# EAGLE board controller_smd_canosc (EAGLE 4.13)
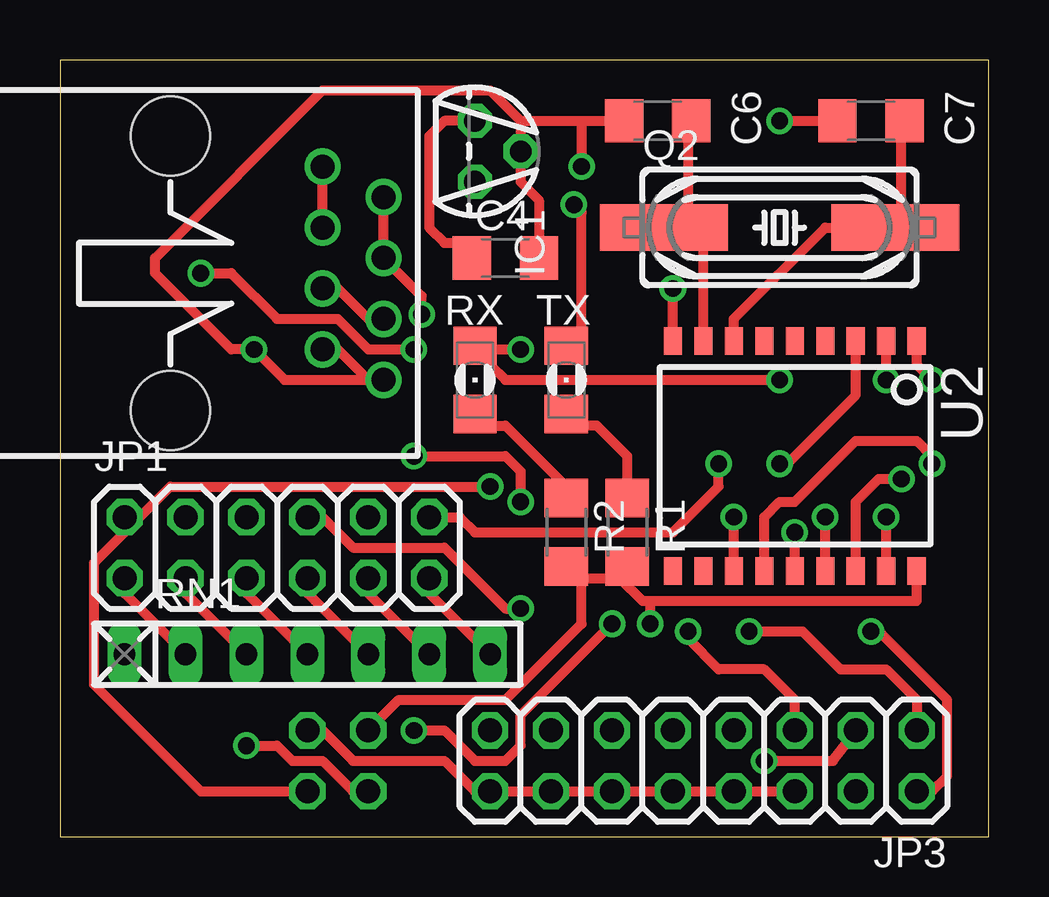
[diagram p0: board, top side]
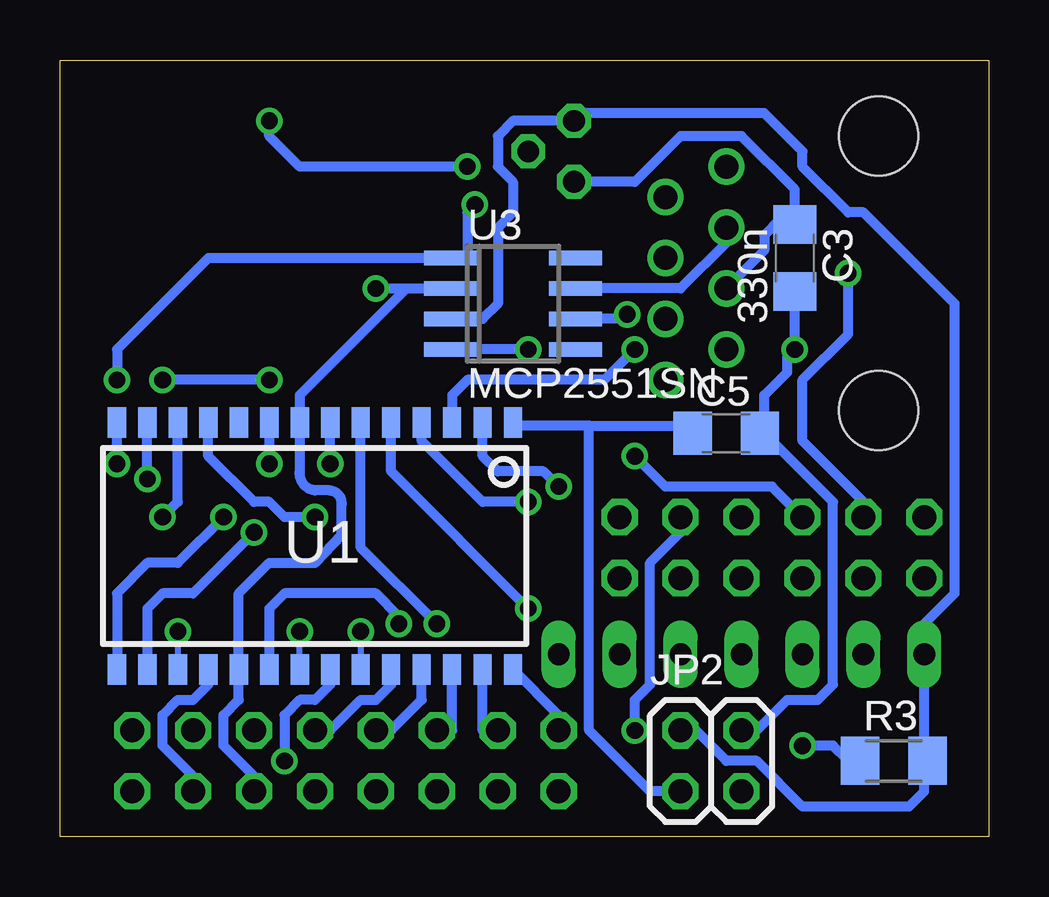
[diagram p1: board, bottom side, seen from below]

Size 38.72 x 32.37 mm. Coordinates in mm from the lower left corner, seen from the top.
Outline: 0,0 38.72,0 38.72,32.37 0,32.37 0,0
Copper layers (1*16): Top 0.035mm / dielectric 1.5mm / Bottom 0.035mm
Design rules "10mils": minimum track width 10mil, minimum drill 24mil, track to track 10mil, track to pad 10mil, pad to pad 10mil, via to via 10mil, smd to smd 10mil, copper to edge 40mil, drill to drill 10mil, minimum pad ring 10mil, minimum via ring 8mil, stop-mask expansion 0mil, vias tented up to drill 0mil, thermal gap 10mil

## Footprints (pad centres in the part's own frame; a part is rotated, then mirrored left to right if it is on the bottom)
C1206 = smd 1.6 x 1.8: 1 -1.4,0; 2 1.4,0
TO92 = drill 0.9 octagon: 1 -1.27,0; 2 0,1.905; 3 1.27,0
2X06 = drill 1 octagon: 1 -6.35,-1.27; 2 -6.35,1.27; 3 -3.81,-1.27; 4 -3.81,1.27; 5 -1.27,-1.27; 6 -1.27,1.27; 7 1.27,-1.27; 8 1.27,1.27; 9 3.81,-1.27; 10 3.81,1.27; 11 6.35,-1.27; 12 6.35,1.27
2X02 = drill 1 octagon: 1 -1.27,-1.27; 2 -1.27,1.27; 3 1.27,-1.27; 4 1.27,1.27
2X08 = drill 1 octagon: 1 -8.89,-1.27; 2 -8.89,1.27; 3 -6.35,-1.27; 4 -6.35,1.27; 5 -3.81,-1.27; 6 -3.81,1.27; 7 -1.27,-1.27; 8 -1.27,1.27; 9 1.27,-1.27; 10 1.27,1.27; 11 3.81,-1.27; 12 3.81,1.27; 13 6.35,-1.27; 14 6.35,1.27; 15 8.89,-1.27; 16 8.89,1.27
HC49UP = smd 5.334 x 1.93: 1 -4.826,0; 2 4.826,0
R1206 = smd 1.6 x 1.803: 1 -1.422,0; 2 1.422,0
M1206 = smd 1.6 x 2: 1 -1.4,0; 2 1.4,0
RN-7 = drill 0.9 long: 1 -7.62,0; 2 -5.08,0; 3 -2.54,0; 4 0,0; 5 2.54,0; 6 5.08,0; 7 7.62,0
1206 = smd 1.6 x 1.803: A -1.422,0; C 1.422,0
SO-28W = smd 0.762 x 1.27: 1 -7.62,-5.207; 2 -6.35,-5.207; 3 -5.08,-5.207; 4 -3.81,-5.207; 5 -2.54,-5.207; 6 -1.27,-5.207; 7 0,-5.207; 8 1.27,-5.207; 9 2.54,-5.207; 10 3.81,-5.207; 11 5.08,-5.207; 12 6.35,-5.207; 13 7.62,-5.207; 14 8.89,-5.207; 15 8.89,5.08; 16 7.62,5.08; 17 6.35,5.08; 18 5.08,5.08; 19 3.81,5.08; 20 2.54,5.08; 21 1.27,5.08; 22 0,5.08; 23 -1.27,5.08; 24 -2.54,5.08; 25 -3.81,5.08; 26 -5.08,5.08; 27 -6.35,5.08; 28 -7.62,5.08
SO-18W = smd 0.762 x 1.143: 1 -5.08,-4.788; 2 -3.81,-4.788; 3 -2.54,-4.788; 4 -1.27,-4.788; 5 0,-4.788; 6 1.27,-4.788; 7 2.54,-4.788; 8 3.81,-4.788; 9 5.08,-4.788; 10 5.08,4.788; 11 3.81,4.788; 12 2.54,4.788; 13 1.27,4.788; 14 0,4.788; 15 -1.27,4.788; 16 -2.54,4.788; 17 -3.81,4.788; 18 -5.08,4.788
SO-08 = smd 0.6 x 2.2: 1 -1.905,-2.6; 2 -0.635,-2.6; 3 0.635,-2.6; 4 1.905,-2.6; 5 1.905,2.6; 6 0.635,2.6; 7 -0.635,2.6; 8 -1.905,2.6
RJ45H = drill 1 round: P$1 -4.445,6.35; P$2 -3.175,8.89; P$3 -1.905,6.35; P$4 -0.635,8.89; P$5 0.635,6.35; P$6 1.905,8.89; P$7 3.175,6.35; P$8 4.445,8.89 | hole 3.3: -5.715,0; 5.715,0

## Placement (x,y rotation side)
C3  330n  [C1206]  8.09,24.12 270 bottom
C4  10n  [C1206]  18.57,24.12 0 top
C5  [C1206]  10.95,16.82 0 bottom
C6  [C1206]  24.92,29.84 180 top
C7  [C1206]  33.81,29.84 180 top
IC1  78L05Z  [TO92]  17.3,28.57 270 top
JP1  [2X06]  9.04,12.06 0 top
JP2  [2X02]  11.58,3.17 0 bottom
JP3  [2X08]  26.82,3.17 180 top
Q2  [HC49UP]  30,25.4 0 top
R1  [R1206]  23.65,12.7 270 top
R2  [R1206]  21.11,12.7 270 top
R3  [M1206]  3.96,3.17 0 bottom
RN1  [RN-7]  10.31,7.62 0 top
RX  [1206]  17.3,19.04 90 top
TX  [1206]  21.11,19.04 90 top
U1  PIC16F876SO  [SO-28W]  27.46,12.06 180 bottom
U2  MCP2510SO  [SO-18W]  30.63,15.87 180 top
U3  MCP2551SN  [SO-08]  19.84,22.22 270 bottom
U$1  RJ45H  [RJ45H]  4.6,23.49 270 top

## Library data of the parts
C3-C7 R1-R3 = rcl
IC1 JP1-JP3 RN1 U2 U$1 = controller
Q2 = crystal
RX TX = led
U1 = pic16f87x
U3 = microchip_can

## Nets
CAN+: U3.7 U$1.P$1 U$1.P$3
CAN-: U3.6 U$1.P$2 U$1.P$4
CAN_RX: RX.C U2.2 U3.4
CAN_TX: TX.C U2.1 U3.1
CANINT: U1.11 U2.12
GND: C3.2 C4.2 C5.2 C6.2 C7.2 IC1.2 JP2.4 JP3.6 JP3.8 JP3.10 JP3.12 JP3.14 JP3.16 U1.8 U1.19 U2.9 U3.2 U$1.P$7 U$1.P$8
MCP_RESET: U1.12 U2.17
MCP_SELECT: U1.13 U2.16
N$3: R1.1 TX.A
N$4: R2.1 RX.A
N$5: JP1.11 RN1.7
N$8: C3.1 IC1.3 U$1.P$5 U$1.P$6
N$9: JP1.9 RN1.6
N$10: JP1.7 RN1.5
N$11: JP1.5 RN1.4
N$12: JP1.3 RN1.3
N$13: JP1.1 RN1.2
OSC1: C6.1 Q2.1 U2.8
OSC2: C7.1 Q2.2 U2.7
PICCLK: U1.9 U2.3
RA0: JP1.2 JP2.3 U1.2
RA1: JP1.4 U1.3
RA2: JP1.6 U1.4
RA3: JP1.8 U1.5
RA4: JP1.10 U1.6
RA5: JP1.12 U1.7
RB0: JP3.1 U1.21
RB1: JP3.3 U1.22
RB2: JP3.5 U1.23
RB3: JP3.7 U1.24
RB4: JP3.9 U1.25
RB5: JP3.11 U1.26
RB6: JP3.13 U1.27
RB7: JP3.15 U1.28
RC6: JP3.2 U1.17
RC7: JP3.4 U1.18
SCLK: U1.14 U2.13
SDI: U1.15 U2.15
SDO: U1.16 U2.14
VCC: C4.1 IC1.1 JP2.2 R1.2 R2.2 R3.2 RN1.1 U1.20 U2.18 U3.3
VPP: C5.1 JP2.1 R3.1 U1.1
VREF: U3.5

## Tracks (layer width: path | path; a pad name or v marks a point on that pad's centre or on a via)
CAN+
  Top 0.406: U$1.P$3 U$1.P$1
  Bottom 0.406: U3.7 12.85,22.85 10.95,24.76 U$1.P$3
CAN-  (via drill 0.7)
  Top 0.406: U$1.P$2 U$1.P$4 15.07,22.54 v15.07,21.78
  Bottom 0.406: U3.6 15.27,21.59 v15.07,21.78
CAN_RX  (via drill 0.7)
  Top 0.254: 17.93,19.68 RX.C 17.93,20.32
  Top 0.406: v30,19.04 18.57,19.04 17.93,19.68 | 17.93,20.32 v19.2,20.32 | v34.44,19.04 U2.2
  Bottom 0.406: v30,19.04 v34.44,19.04 | v19.2,20.32 U3.4
CAN_TX  (via drill 0.7)
  Top 0.254: TX.C 21.74,20.95
  Top 0.406: U2.1 35.71,19.68 v36.35,19.04 | v21.42,26.35 21.74,26.03 21.74,20.95
  Bottom 0.254: 21.74,24.12 U3.1
  Bottom 0.406: U3.1 32.54,24.12 36.35,20.32 v36.35,19.04 | 21.74,24.12 21.74,26.03 v21.42,26.35
CANINT  (via drill 0.7)
  Top 0.406: U2.12 v28.09,13.33
  Bottom 0.406: v28.09,13.33 29.36,13.33 30,13.96 30.63,13.96 32.54,15.87 U1.11
GND  (via drill 0.7)
  Top 0.406: 12.85,19.04 11.58,20.32 U$1.P$7 | 19.2,29.84 17.93,31.11 10.95,31.11 3.96,24.12 3.96,23.49 7.14,20.32 v8.09,20.32 9.36,19.04 12.85,19.04 | 12.85,19.04 U$1.P$8 | U2.9 v25.55,22.85 | 19.2,29.84 21.74,29.84 | 21.74,29.84 C6.2 | 21.74,29.84 v21.74,27.93 | v30,29.84 C7.2 | 19.2,29.84 IC1.2 19.2,27.3 19.97,26.54 C4.2 | JP3.6 JP3.8 JP3.10 JP3.12 JP3.14 JP3.16 17.3,1.9 16.03,3.17 12.22,3.17 10.95,4.44 JP2.4
  Bottom 0.406: 24.28,22.85 U3.2 | 24.28,22.85 28.73,18.41 U1.8 28.73,15.23 arc-90 28.09,14.44 27.49,14.44 arc90 26.98,13.87 26.98,12.6 28.09,11.42 30,11.42 31.27,10.16 U1.19 31.27,5.71 31.9,5.07 31.9,3.8 30.63,2.53 JP3.6 | v25.55,22.85 24.28,22.85 | v21.74,27.93 28.73,27.93 30,29.21 v30,29.84 | JP2.4 9.68,4.44 8.41,5.71 7.14,5.71 6.5,6.34 6.5,13.96 9.36,16.82 | 9.36,16.82 C5.2 | 9.36,16.82 9.36,18.41 8.41,19.36 8.41,20 v8.09,20.32 C3.2
MCP_RESET  (via drill 0.7)
  Top 0.406: U2.17 v34.44,13.33
  Bottom 0.406: v34.44,13.33 33.81,13.96 U1.12
MCP_SELECT  (via drill 0.7)
  Top 0.406: 33.17,10.79 U2.16 33.17,13.96 34.12,14.92 v35.08,14.92
  Bottom 0.406: v35.08,14.92 U1.13
N$3
  Top 0.406: R1.1 23.65,15.87 22.38,17.14 21.74,17.14 21.11,17.77 TX.A
N$4
  Top 0.254: RX.A 17.93,17.14
  Top 0.406: RX.A 17.3,17.77 | R2.1 21.11,14.6 18.57,17.14 17.93,17.14
N$5
  Top 0.406: JP1.11 15.39,10.16 RN1.7
N$8
  Top 0.406: U$1.P$6 12.85,21.59 11.58,22.85 U$1.P$5
  Bottom 0.406: IC1.3 14.76,27.3 12.85,29.21 10.31,29.21 8.09,26.98 C3.1 8.09,25.4 8.41,25.71 8.73,25.71 9.36,25.08 9.36,24.44 U$1.P$5
N$9
  Top 0.406: JP1.9 12.85,10.16 RN1.6
N$10
  Top 0.406: JP1.7 10.31,10.16 RN1.5
N$11
  Top 0.406: JP1.5 7.77,10.16 RN1.4
N$12
  Top 0.406: JP1.3 5.23,10.16 RN1.3
N$13
  Top 0.406: JP1.1 2.69,10.16 RN1.2
OSC1
  Top 0.254: 24.92,25.4 Q2.1 26.19,25.4 26.82,25.4 | 26.19,29.84 C6.1
  Top 0.406: 26.19,29.84 26.19,25.4 26.82,24.76 U2.8
OSC2
  Top 0.254: 35.08,25.4 Q2.2 35.08,25.65 | 35.08,29.84 C7.1
  Top 0.406: Q2.2 31.9,25.4 28.09,21.59 U2.7 28.09,20.32 | 35.08,25.65 35.08,29.84
PICCLK  (via drill 0.7)
  Top 0.406: U2.3 33.17,18.41 30.31,15.55 v30,15.55
  Bottom 0.406: U1.9 v30,15.55
RA0  (via drill 0.7)
  Top 0.406: JP2.3 5.87,1.9 1.42,6.34 1.42,11.42 2.69,12.7 JP1.2 3.33,13.33 4.6,14.6 v17.93,14.6
  Bottom 0.406: U1.2 21.11,15.87 20.47,15.23 18.57,15.23 v17.93,14.6
RA1  (via drill 0.7)
  Top 0.406: v14.76,20.32 12.85,20.32 11.58,21.59 9.04,21.59 7.14,23.49 v5.87,23.49
  Bottom 0.406: v14.76,20.32 16.03,19.04 21.74,19.04 22.38,18.41 U1.3 | JP1.4 5.23,13.96 7.77,16.5 7.77,19.04 5.87,20.95 v5.87,23.49
RA2  (via drill 0.7)
  Top 0.406: v19.2,13.96 19.2,15.23 18.57,15.87 v14.76,15.87
  Bottom 0.406: JP1.6 9.04,14.6 10.31,14.6 13.49,14.6 v14.76,15.87 | U1.4 23.65,16.5 21.11,13.96 v19.2,13.96
RA3  (via drill 0.7)
  Top 0.406: v19.2,9.52 18.57,9.52 16.03,12.06 12.22,12.06 10.95,13.33 JP1.8
  Bottom 0.406: v19.2,9.52 24.92,15.23 U1.5
RA4  (via drill 0.7)
  Top 0.406: v23.01,8.88 19.2,5.07 19.2,3.8 18.57,3.17 17.3,3.17 16.03,4.44 v14.76,4.44
  Bottom 0.406: v23.01,8.88 26.19,12.06 U1.6 | v14.76,4.44 14.76,5.71 14.12,6.34 14.12,11.42 12.85,12.7 JP1.10
RA5  (via drill 0.7)
  Top 0.406: v27.46,15.55 27.46,14.6 25.55,12.7 17.3,12.7 16.66,13.33 JP1.12
  Bottom 0.406: v27.46,15.55 U1.7
RB0  (via drill 0.7)
  Top 0.406: v28.73,8.57 30.95,8.57 32.54,6.98 34.44,6.98 35.71,5.71 JP3.1
  Bottom 0.254: U1.21 v28.73,8.57
RB1  (via drill 0.7)
  Top 0.406: v29.36,3.17 32.22,3.17 33.17,4.41 JP3.3
  Bottom 0.406: U1.22 27.46,6.34 28.09,5.71 28.73,5.71 29.36,5.07 v29.36,3.17
RB2  (via drill 0.7)
  Top 0.406: v26.19,8.57 26.19,8.25 27.46,6.98 29.36,6.98 30.63,5.71 JP3.5
  Bottom 0.254: v26.19,8.57 U1.23
RB3
  Bottom 0.254: 24.92,6.34 U1.24
  Bottom 0.406: 24.92,6.34 25.55,5.71 26.19,5.71 27.46,4.44 JP3.7
RB4
  Bottom 0.406: U1.25 23.65,5.71 24.92,4.44 JP3.9
RB5
  Bottom 0.406: U1.26 22.38,4.44 JP3.11
RB6
  Bottom 0.406: U1.27 21.11,4.44 JP3.13
RB7
  Bottom 0.406: U1.28 17.93,5.07 JP3.15
RC6  (via drill 0.7)
  Top 0.406: v33.81,8.57 34.12,8.57 36.98,5.71 36.98,2.53 36.35,1.9 JP3.2
  Bottom 0.254: v33.81,8.57 U1.17
RC7
  Bottom 0.254: 32.54,6.34 U1.18
  Bottom 0.406: 32.54,6.34 33.17,5.71 33.81,5.71 34.44,5.07 34.44,3.8 33.17,2.53 JP3.4
SCLK  (via drill 0.7)
  Top 0.406: U2.13 29.36,13.33 30,13.96 30.63,13.96 33.17,16.5 35.71,16.5 36.35,15.87 v36.35,15.55
  Bottom 0.406: v36.35,15.55 U1.14
SDI  (via drill 0.7)
  Top 0.406: U2.15 v31.9,13.33
  Bottom 0.406: U1.15 36.35,10.16 35.08,11.42 33.81,11.42 v31.9,13.33
SDO  (via drill 0.7)
  Top 0.406: U2.14 v30.63,12.7
  Bottom 0.406: U1.16 35.08,9.52 34.44,10.16 33.17,10.16 v30.63,12.7
VCC  (via drill 0.7)
  Top 0.254: 23.01,10.79 R1.2 | 16.66,24.76 C4.1
  Top 0.406: 24.6,9.84 35.71,9.84 U2.18 | 24.6,9.84 v24.6,8.88 | 24.6,9.84 24.28,9.84 23.33,10.79 23.01,10.79 21.74,10.79 | 16.66,24.76 16.03,24.76 15.39,25.4 15.39,29.21 16.03,29.84 IC1.1 | JP2.2 14.12,5.71 18.57,5.71 21.74,8.88 21.74,10.79 | R2.2 21.11,11.42 21.74,10.79
  Bottom 0.406: U3.3 21.11,21.59 20.47,22.22 20.47,25.4 19.84,26.03 19.84,27.3 20.47,27.93 20.47,29.21 19.84,29.84 IC1.1 16.98,30.16 9.36,30.16 7.77,28.57 7.77,27.93 5.87,26.03 5.23,26.03 1.42,22.22 1.42,10.16 2.69,8.88 RN1.1 2.69,3.17 | U1.20 30,9.52 29.36,10.16 25.55,10.16 24.6,9.2 v24.6,8.88 | JP2.2 12.22,4.44 10.95,3.17 9.68,3.17 7.77,1.27 3.33,1.27 2.69,1.9 2.69,3.17 | 2.69,3.17 R3.2
VPP  (via drill 0.7)
  Top 0.406: v7.77,3.8 9.04,3.8 9.68,3.17 10.95,3.17 12.22,1.9 JP2.1
  Bottom 0.254: 19.84,17.14 U1.1
  Bottom 0.406: 16.66,17.14 19.84,17.14 | C5.1 12.22,16.82 12.54,17.14 16.66,17.14 | R3.1 5.87,3.17 6.5,3.8 v7.77,3.8 | JP2.1 14.12,1.9 16.66,4.44 16.66,17.14

## Text on the board
bNames: C3 | C3 | 330n | 330n | U3 | U3 | C5 | C5 | MCP2551SN | MCP2551SN | JP2 | JP2 | R3 | R3
tTest: LH
tDocu: . | - | - | - | - | - | - | CAN node v1.0 | [LH] | .